# EAGLE board BMS (EAGLE 6.6.0)
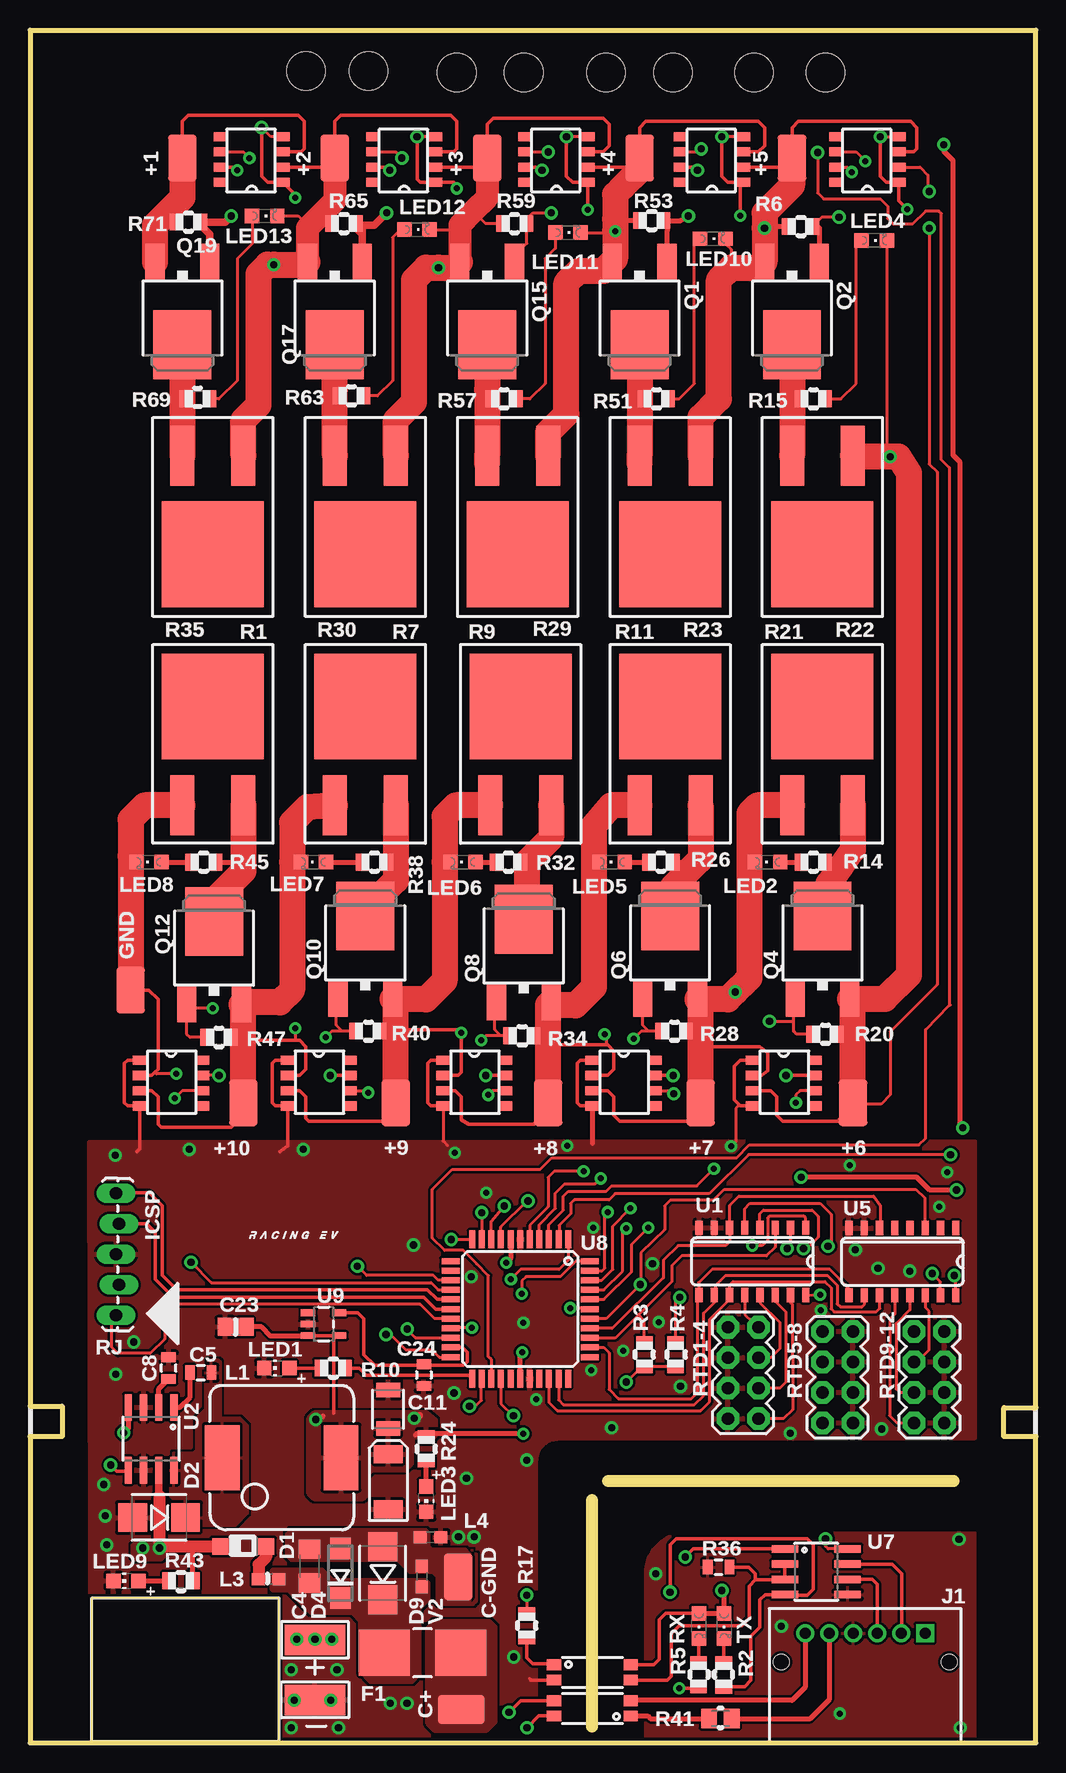
[diagram p0: board, top side]
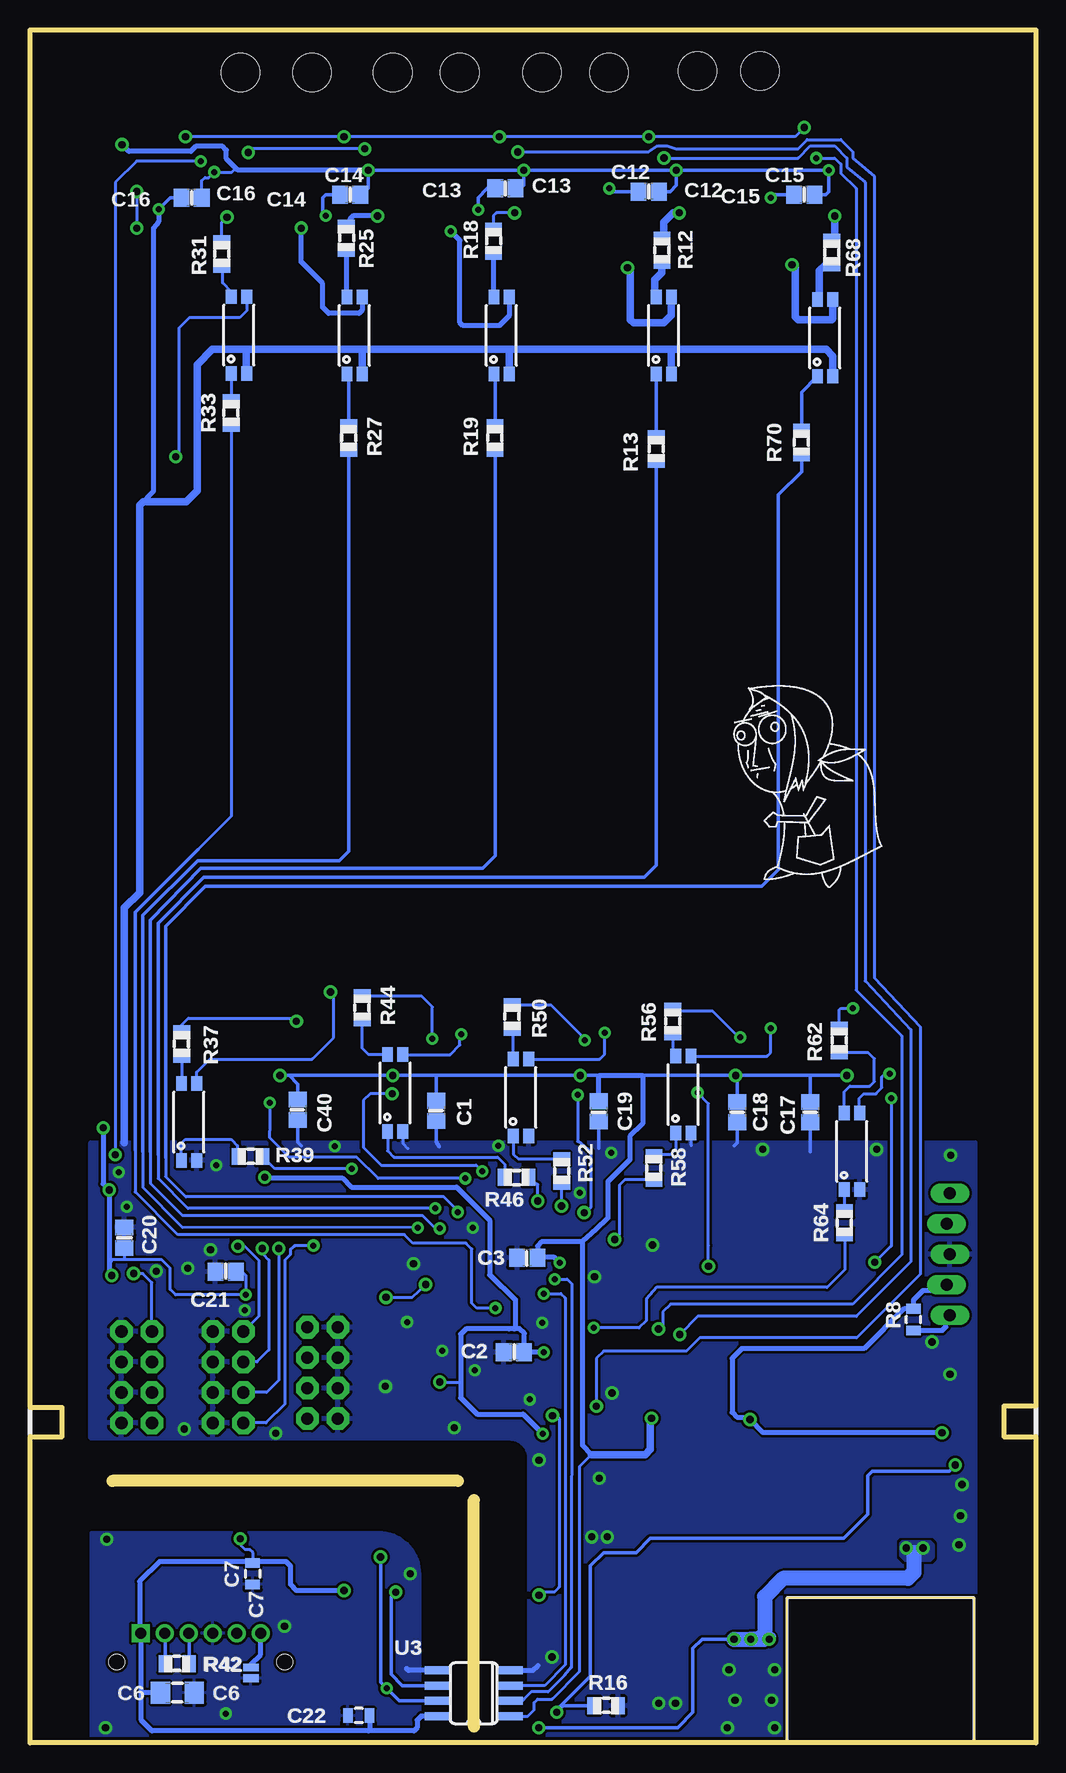
[diagram p1: board, bottom side, seen from below]

Size 83.82 x 142.75 mm. Coordinates in mm from the lower left corner, seen from the top.
Outline: 46.84,1.38 46.84,20.27
Outline: 48.15,21.84 76.96,21.84
Outline: 0,0 83.82,0 83.82,25.53 81.15,25.53 81.15,27.94 83.82,27.94 83.82,142.75 0,142.75 0,28.07 2.67,28.07 2.67,25.53 0,25.53 0,0
Copper layers (1*16): Top 0.035mm / dielectric 1.5mm / Bottom 0.035mm
Design rules "SparkFun *": minimum track width 8mil, minimum drill 18mil, track to track 8mil, track to pad 8mil, pad to pad 8mil, via to via 8mil, smd to smd 8mil, copper to edge 10mil, drill to drill 8mil, minimum pad ring 12mil, minimum via ring 10mil, stop-mask expansion 4mil, vias tented up to drill 25mil, thermal gap 10mil
Holes 3.2 mm at 22.99,139.32 28.19,139.32 35.56,139.19 41.15,139.19 48.01,139.19 53.59,139.19 60.32,139.19 66.29,139.19

## Footprints (pad centres in the part's own frame; a part is rotated, then mirrored left to right if it is on the bottom)
LUXEON-PAD = smd 3.9 x 2.4: P$1 0,0
C0805 = smd 1.3 x 1.5: 1 -0.85,0; 2 0.85,0
1206 = smd 1.6 x 1.8: 1 -1.4,0; 2 1.4,0
0805 = smd 0.8 x 1.2: 1 -0.9,0; 2 0.9,0
EIA6032 = smd 1.5 x 2.4: P$1 -2.3,0; P$2 2.3,0
UVR1J101MPD-CUTOUT = smd 5.08 x 2.54: + 0,2.5; - 0,-2.5
1210 = smd 1.2 x 2: 1 -1.6,0; 2 1.6,0
SOD123 = smd 1.4 x 1.4: A 1.9,0; C -1.9,0
SMB-DIODE = smd 2.4 x 2.4: A 2.2,0; C -2.2,0
DO-214AC = smd 1.8 x 1.7: A 2.05,0; C -2.05,0
0154XXDR = smd 4.24 x 3.81: 1 -3.19,0; 2 3.19,0
1X05_LOCK_LONGPADS = drill 1.016 long: 1 0,0; 2 2.54,-0.254; 3 5.08,0; 4 7.62,-0.254; 5 10.16,0
559350610 = drill 0.9 square: 1 -5,0 | drill 0.9: 2 -3,0; 3 -1,0; 4 1,0; 5 3,0; 6 5,0 | hole 1.3: 7,2.4; -7,2.4
INDUCTOR_5X3 = smd 2.9 x 5.4: 1 -4.95,0; 2 4.95,0
0603 = smd 1.1 x 1: 1 -0.85,0; 2 0.85,0
CHIP-LED0805 = smd 1.2 x 1.2: A 0,-1.05; C 0,1.05
CHIPLED_0805 = smd 1.2 x 1.2: A 0,-1.05; C 0,1.05
DPAK = smd 1.6 x 3: 1 -2.28,-4.04; 3 2.28,-4.04 | smd 4.826 x 5.715: 2 0,2.858
PFC10-5RF1 = smd 2 x 5: 1 -2.54,-8.22; 2 2.54,-8.22 | smd 8.5 x 8.8: TP 0,0
R0805 = smd 1.1 x 1.4: 1 -1,0; 2 1,0
M0805 = smd 1.3 x 1.6: 1 -0.95,0; 2 0.95,0
2X4 = drill 1.016 pad 1.88 octagon: 1 -3.81,-1.27; 2 -3.81,1.27; 3 -1.27,-1.27; 4 -1.27,1.27; 5 1.27,-1.27; 6 1.27,1.27; 7 3.81,-1.27; 8 3.81,1.27
PAD-JUMPER-2-NO_NO_SILK = smd 0.635 x 1.27: 1 -0.45,0; 2 0.45,0
SO-16 = smd 0.6 x 1.2: 1 -4.445,-2.8; 2 -3.175,-2.8; 3 -1.905,-2.8; 4 -0.635,-2.8; 5 0.635,-2.8; 6 1.905,-2.8; 7 3.175,-2.8; 8 4.445,-2.8; 9 4.445,2.8; 10 3.175,2.8; 11 1.905,2.8; 12 0.635,2.8; 13 -0.635,2.8; 14 -1.905,2.8; 15 -3.175,2.8; 16 -4.445,2.8
SO-8 = smd 0.61 x 2.21: 1 -1.905,-2.616; 2 -0.635,-2.616; 3 0.635,-2.616; 4 1.905,-2.616; 5 1.905,2.616; 6 0.635,2.616; 7 -0.635,2.616; 8 -1.905,2.616
SOIC-8 = smd 0.66 x 2.032: 1 -1.905,-3.073; 2 -0.635,-3.073; 3 0.635,-3.073; 4 1.905,-3.073; 5 1.905,3.073; 6 0.635,3.073; 7 -0.635,3.073; 8 -1.905,3.073
TQFP-44 = smd 1.5 x 0.5: 1 -5.8,4; 2 -5.8,3.2; 3 -5.8,2.4; 4 -5.8,1.6; 5 -5.8,0.8; 6 -5.8,0; 7 -5.8,-0.8; 8 -5.8,-1.6; 9 -5.8,-2.4; 10 -5.8,-3.2; 11 -5.8,-4; 23 5.8,-4; 24 5.8,-3.2; 25 5.8,-2.4; 26 5.8,-1.6; 27 5.8,-0.8; 28 5.8,0; 29 5.8,0.8; 30 5.8,1.6; 31 5.8,2.4; 32 5.8,3.2; 33 5.8,4 | smd 0.5 x 1.5: 12 -4,-5.8; 13 -3.2,-5.8; 14 -2.4,-5.8; 15 -1.6,-5.8; 16 -0.8,-5.8; 17 0,-5.8; 18 0.8,-5.8; 19 1.6,-5.8; 20 2.4,-5.8; 21 3.2,-5.8; 22 4,-5.8; 34 4,5.8; 35 3.2,5.8; 36 2.4,5.8; 37 1.6,5.8; 38 0.8,5.8; 39 0,5.8; 40 -0.8,5.8; 41 -1.6,5.8; 42 -2.4,5.8; 43 -3.2,5.8; 44 -4,5.8
SOT23-5 = smd 0.55 x 1.2: 1 -0.95,-1.3; 2 0,-1.3; 3 0.95,-1.3; 4 0.95,1.3; 5 -0.95,1.3
LT1990 = smd 0.762 x 1.143: 1 0,0; 2 1.27,0; 3 2.54,0; 4 3.81,0; 5 3.81,5.207; 6 2.54,5.207; 7 1.27,5.207; 8 0,5.207
SSOP-4 = smd 1.2 x 0.9: 1 -3.2,0.67; 2 -3.2,-0.6; 3 3.2,-0.6; 4 3.2,0.67

## Placement (x,y rotation side)
+1  M01SMD  [LUXEON-PAD]  12.7,132.08 90 top
+2  M01SMD  [LUXEON-PAD]  25.4,132.08 90 top
+3  M01SMD  [LUXEON-PAD]  38.1,132.08 90 top
+4  M01SMD  [LUXEON-PAD]  50.8,132.08 90 top
+5  M01SMD  [LUXEON-PAD]  63.5,132.08 90 top
+6  M01SMD  [LUXEON-PAD]  68.58,53.34 90 top
+7  M01SMD  [LUXEON-PAD]  55.88,53.34 90 top
+8  M01SMD  [LUXEON-PAD]  43.18,53.34 90 top
+9  M01SMD  [LUXEON-PAD]  30.48,53.34 90 top
+10  M01SMD  [LUXEON-PAD]  17.78,53.34 90 top
C1  .1uF  [C0805]  49.97,52.67 270 bottom
C2  .1uF  [C0805]  43.49,32.57 180 bottom
C3  .1uF  [C0805]  42.38,40.43 180 bottom
C4  1uF  [1206]  23.3,14.74 90 top
C5  0.1uF  [0805]  14.22,30.86 0 top
C6  10uF  [1206]  71.54,4.19 0 bottom
C7  .1uF  [0805]  65.27,14.11 270 bottom
C8  0.1uF  [0805]  11.56,31.24 90 top
C9  68uF  [EIA6032]  29.86,21.77 270 top
C10  100uF  [UVR1J101MPD-CUTOUT]  23.75,6.1 0 top
C11  1uF  [1210]  29.84,27.81 90 top
C12  .1uF  [C0805]  32.26,129.29 180 bottom
C13  .1uF  [C0805]  44.2,129.54 180 bottom
C14  .1uF  [C0805]  57.15,129.03 180 bottom
C15  .1uF  [C0805]  19.3,129.03 180 bottom
C16  .1uF  [C0805]  70.36,128.78 180 bottom
C17  .1uF  [C0805]  18.8,52.58 270 bottom
C18  .1uF  [C0805]  24.89,52.58 270 bottom
C19  .1uF  [C0805]  36.42,52.63 270 bottom
C20  .1uF  [C0805]  75.95,42.11 90 bottom
C21  .1uF  [C0805]  67.51,39.27 180 bottom
C22  .1uF  [0805]  56.42,2.29 180 bottom
C23  .1uF  [C0805]  17.13,34.67 180 top
C24  0.1uF  [0805]  32.82,30.66 270 top
C40  .1uF  [C0805]  61.51,52.76 270 bottom
C+  M01SMD  [LUXEON-PAD]  35.94,2.79 180 top
C-GND  M01SMD  [LUXEON-PAD]  35.69,13.84 270 top
D1  1N4001  [SOD123]  17.77,16.37 0 top
D2  VS-30BQ060TRPBF  [SMB-DIODE]  10.75,18.78 180 top
D4  TVS  [DO-214AC]  25.88,14.14 90 top
D9  45V  [SMB-DIODE]  29.4,14.14 90 top
F1  01541.25DR  [0154XXDR]  32.71,7.52 180 top
GND  M01SMD  [LUXEON-PAD]  8.38,62.74 270 top
ICSP  [1X05_LOCK_LONGPADS]  7.17,35.64 90 top
J1  55935-0610  [559350610]  69.6,9.14 180 top
L1  7447714101  [INDUCTOR_5X3]  20.97,23.78 0 top
L3  FERITEBEAD  [0603]  19.89,13.66 180 top
L4  FERITEBEAD  [0603]  33.37,17.16 0 top
LED1  [CHIP-LED0805]  20.57,31.24 90 top
LED2  [CHIPLED_0805]  61.47,73.41 90 top
LED3  [CHIP-LED0805]  33.02,20.32 180 top
LED4  [CHIPLED_0805]  70.36,125.22 270 top
LED5  [CHIPLED_0805]  48.51,73.41 90 top
LED6  [CHIPLED_0805]  36.07,73.41 90 top
LED7  [CHIPLED_0805]  23.62,73.41 90 top
LED8  [CHIPLED_0805]  9.91,73.41 90 top
LED9  [CHIP-LED0805]  8.01,13.51 90 top
LED10  [CHIPLED_0805]  56.9,125.35 270 top
LED11  [CHIPLED_0805]  44.83,125.86 270 top
LED12  [CHIPLED_0805]  32.26,126.11 270 top
LED13  [CHIPLED_0805]  19.56,127.25 270 top
Q1  MJD127T4  [DPAK]  50.8,119.38 180 top
Q2  MJD127T4  [DPAK]  63.5,119.38 180 top
Q4  MJD127T4  [DPAK]  66.04,66.04 0 top
Q6  MJD127T4  [DPAK]  53.34,66.04 0 top
Q8  MJD127T4  [DPAK]  41.15,65.79 0 top
Q10  MJD127T4  [DPAK]  27.94,66.04 0 top
Q12  MJD127T4  [DPAK]  15.34,65.6 0 top
Q15  MJD127T4  [DPAK]  38.1,119.38 180 top
Q17  MJD127T4  [DPAK]  25.4,119.38 180 top
Q19  MJD127T4  [DPAK]  12.7,119.38 180 top
R1  PFC10-5RF1  [PFC10-5RF1]  15.24,86.36 0 top
R2  1k  [R0805]  57.81,5.66 270 top
R3  10k  [R0805]  51.21,32.36 90 top
R4  10k  [R0805]  53.8,32.36 90 top
R5  1k  [R0805]  55.71,5.69 270 top
R6  10k  [R0805]  64.21,126.37 0 top
R7  PFC10-5RF1  [PFC10-5RF1]  27.94,86.36 0 top
R8  10k  [0805]  10.19,35.28 90 bottom
R9  PFC10-5RF1  [PFC10-5RF1]  40.89,86.36 0 top
R10  1k  [R0805]  25.27,31.24 0 top
R11  PFC10-5RF1  [PFC10-5RF1]  53.34,86.36 0 top
R12  330  [R0805]  31.16,124.39 270 bottom
R13  200  [R0805]  31.62,107.82 90 bottom
R14  399  [R0805]  65.28,73.41 0 top
R15  399  [R0805]  65.28,112.01 180 top
R16  100k  [R0805]  35.81,3.11 180 bottom
R17  1k  [R0805]  41.4,9.78 90 top
R18  330  [R0805]  45.2,125.15 270 bottom
R19  200  [R0805]  45.06,108.75 90 bottom
R20  10k  [R0805]  66.25,59.07 180 top
R21  PFC10-5RF1  [PFC10-5RF1]  66.04,86.36 0 top
R22  PFC10-5RF1  [PFC10-5RF1]  66.04,99.06 180 top
R23  PFC10-5RF1  [PFC10-5RF1]  53.34,99.06 180 top
R24  1k  [R0805]  33.02,24.51 90 top
R25  330  [R0805]  57.46,125.4 270 bottom
R26  399  [R0805]  52.58,73.41 0 top
R27  200  [R0805]  57.27,108.75 90 bottom
R28  10k  [R0805]  53.67,59.33 180 top
R29  PFC10-5RF1  [PFC10-5RF1]  40.64,99.06 180 top
R30  PFC10-5RF1  [PFC10-5RF1]  27.94,99.06 180 top
R31  330  [R0805]  67.85,124.08 270 bottom
R32  399  [R0805]  39.88,73.41 0 top
R33  200  [R0805]  67.06,110.83 90 bottom
R34  10k  [R0805]  40.97,58.94 180 top
R35  PFC10-5RF1  [PFC10-5RF1]  15.24,99.06 180 top
R36  10k  [0805]  57.38,14.65 0 top
R37  330  [R0805]  71.18,58.24 270 bottom
R38  399  [R0805]  28.7,73.41 0 top
R39  200  [R0805]  65.44,48.88 180 bottom
R40  10k  [R0805]  28.15,59.33 180 top
R41  [M0805]  57.53,2.03 0 top
R42  120  [R0805]  71.56,6.59 180 bottom
R43  3.3k  [R0805]  12.58,13.51 0 top
R44  330  [R0805]  56.14,61.27 270 bottom
R45  399  [R0805]  14.48,73.41 0 top
R46  200  [R0805]  43.27,47.14 180 bottom
R47  10k  [R0805]  15.75,58.8 180 top
R50  330  [R0805]  43.64,60.5 270 bottom
R51  399  [R0805]  52.2,112.01 180 top
R52  200  [R0805]  39.51,47.66 90 bottom
R53  10k  [R0805]  51.82,126.87 0 top
R56  330  [R0805]  30.25,60.12 270 bottom
R57  399  [R0805]  39.5,112.01 180 top
R58  200  [R0805]  31.83,47.92 90 bottom
R59  10k  [R0805]  40.39,126.62 0 top
R62  330  [R0805]  16.38,58.55 270 bottom
R63  399  [R0805]  26.8,112.27 180 top
R64  200  [R0805]  15.94,43.35 90 bottom
R65  10k  [R0805]  26.16,126.62 0 top
R68  330  [R0805]  17.02,124.21 270 bottom
R69  399  [R0805]  13.97,112.01 180 top
R70  200  [R0805]  19.53,108.37 90 bottom
R71  10k  [R0805]  13.21,126.75 0 top
RTD1-4  M04X2  [2X4]  59.44,30.84 90 top
RTD5-8  M04X2  [2X4]  67.31,30.48 90 top
RTD9-12  M04X2  [2X4]  74.93,30.48 270 top
RX  [CHIPLED_0805]  55.74,9.75 180 top
SJ1  JUMPER-PAD-2-NO  [PAD-JUMPER-2-NO_NO_SILK]  65.4,5.84 270 bottom
TX  [CHIPLED_0805]  57.84,9.75 180 top
U1  SN74LV4051ADR  [SO-16]  60.2,40.13 180 top
U2  MAX5035  [SO-8]  10.09,25.34 180 top
U3  ISO7221ADR  [SOIC-8]  46.84,4.15 90 bottom
U5  SN74LV4051ADR  [SO-16]  72.69,40.11 180 top
U7  SN75HVD08DR  [SO-8]  65.51,14.27 270 top
U8  PIC18F45K22  [TQFP-44]  40.84,36.16 270 top
U9  LM4128CMF-2.0/NOPB  [SOT23-5]  24.47,34.9 270 top
U$1  LT1990  [LT1990]  60.2,56.9 270 top
U$2  LT1990  [LT1990]  46.86,56.9 270 top
U$3  LT1990  [LT1990]  34.42,56.9 270 top
U$4  LT1990  [LT1990]  21.46,56.9 270 top
U$5  LT1990  [LT1990]  9.14,56.9 270 top
U$6  LT1990  [LT1990]  59.44,130.05 90 top
U$7  LT1990  [LT1990]  46.48,130.05 90 top
U$8  LT1990  [LT1990]  33.78,130.05 90 top
U$9  LT1990  [LT1990]  21.08,130.05 90 top
U$10  TCMT1103-OPTO  [SSOP-4]  17.53,117.09 90 bottom
U$11  TCMT1103-OPTO  [SSOP-4]  30.97,117.29 90 bottom
U$12  TCMT1103-OPTO  [SSOP-4]  44.49,117.29 90 bottom
U$13  TCMT1103-OPTO  [SSOP-4]  56.74,117.29 90 bottom
U$14  TCMT1103-OPTO  [SSOP-4]  66.37,117.32 90 bottom
U$15  TCMT1103-OPTO  [SSOP-4]  70.53,51.75 90 bottom
U$16  TCMT1103-OPTO  [SSOP-4]  53.35,54.17 90 bottom
U$17  TCMT1103-OPTO  [SSOP-4]  42.87,53.79 90 bottom
U$18  TCMT1103-OPTO  [SSOP-4]  29.34,54.03 90 bottom
U$19  TCMT1103-OPTO  [SSOP-4]  15.29,49.31 90 bottom
U$20  INDPK1  [PICKIT-PIN-1]  9.76,35.78 270 top
U$21  OLD_LADYM  [0L-M]  25.32,71.26 0 bottom
U$22  LOGO  [L-MS]  15.24,41.2 0 top
U$23  TCMT1103-OPTO  [SSOP-4]  46.86,2.92 180 top
U$24  TCMT1103-OPTO  [SSOP-4]  46.86,5.84 0 top
U$55  LT1990  [LT1990]  72.39,130.05 90 top
V2  45Vdc  [0603]  32.64,13.86 270 top

## Library data of the parts
+1-+10 C+ C-GND GND ICSP RTD1-4 RTD5-8 RTD9-12 = SparkFun-Connectors
C1-C3 C12-C21 C23 C40 LED1-LED13 R2-R6 R10 R12-R20 R24-R28 R31-R34 R37-R47 R50-R53 R56-R59 R62-R65 R68-R71 RX TX = adafruit
C4 C11 = SparkFun-Capacitors
C5-C9 C22 C24 R8 R36 SJ1 = SparkFun-Passives
C10 F1 J1 Q1 Q2 Q4 Q6 Q8 Q10 Q12 Q15 Q17 Q19 R1 R7 R9 R11 R21-R23 R29 R30 R35 U1 U2 U5 U7 U8 U$20 = FSAE Eletric
D1 = diode
D2 U$10-U$19 U$23 U$24 = SparkFun-DiscreteSemi
D4 L1 = NASA_LIB
D9 = SparkFun
L3 L4 V2 = EmEndev
U3 = Gasbarre
U9 = SparkFun-PowerIC
U$1-U$9 U$55 = Sam_Request
U$21 U$22 = Pic

## Nets
+5V: C1.1 C2.1 C3.1 C9.P$1 C11.1 C12.1 C13.1 C14.1 C15.1 C16.1 C17.1 C18.1 C19.1 C20.1 C21.1 C23.1 C40.1 ICSP.2 L1.2 R3.1 R4.1 R8.2 R24.2 U1.16 U2.4 U3.1 U5.16 U8.7 U8.28 U9.3 U9.4 U$1.7 U$2.7 U$3.7 U$4.7 U$5.7 U$6.7 U$7.7 U$8.7 U$9.7 U$55.7
A: U1.11 U5.11 U8.31
B: U1.10 U5.10 U8.32
B1: R70.1 U8.43
B2: R13.1 U8.42
B3: R19.1 U8.41
B4: R27.1 U8.40
B5: R33.1 U8.39
B6: R39.1 U8.3
B7: R46.1 U8.8
B8: R52.1 U8.9
B9: R58.1 U8.11
B10: R64.1 U8.19
C: U1.9 U5.9 U8.35
C1: U8.20 U$9.6
C2: U8.22 U$8.6
C3: U8.24 U$7.6
C4: U8.25 U$6.6
C5: U8.2 U$55.6
C6: U8.4 U$1.6
C7: U8.5 U$2.6
C8: U8.10 U$3.6
C9: U8.14 U$4.6
C10: U8.15 U$5.6
DIR: R36.2 U7.2 U7.3 U$24.3
GHT: D1.A L3.2
GND: C1.2 C2.2 C3.2 C8.2 C9.P$2 C10.- C11.2 C12.2 C13.2 C14.2 C15.2 C16.2 C17.2 C18.2 C19.2 C20.2 C21.2 C23.2 C24.2 C40.2 D2.A ICSP.3 L4.2 LED1.C LED3.C LED9.C R16.1 RTD1-4.2 RTD1-4.4 RTD1-4.6 RTD1-4.8 RTD5-8.1 RTD5-8.3 RTD5-8.5 RTD5-8.7 RTD9-12.2 RTD9-12.4 RTD9-12.6 RTD9-12.8 U1.7 U1.8 U2.3 U2.6 U3.4 U5.7 U5.8 U8.6 U8.29 U9.2 U$1.1 U$1.4 U$2.1 U$2.4 U$3.1 U$3.4 U$4.1 U$4.4 U$5.1 U$5.4 U$6.1 U$6.4 U$7.1 U$7.4 U$8.1 U$8.4 U$9.1 U$9.4 U$10.2 U$11.2 U$12.2 U$13.2 U$14.2 U$15.2 U$16.2 U$17.2 U$18.2 U$19.2 U$24.2 U$55.1 U$55.4
GNDIO: C6.2 C7.2 C22.2 J1.4 R36.1 SJ1.2 U3.5 U7.5
INH: U1.6 U5.6 U8.37
MODE: R17.2 U8.26
N$1: LED1.A R10.1
N$2: R10.2 U8.23
N$3: C10.+ D1.C R43.2 U2.7 U$23.4
N$4: RTD1-4.1 U1.15
N$5: RTD1-4.3 U1.14
N$6: C4.1 D4.C D9.C F1.2 L3.1 V2.2
N$7: RTD1-4.5 U1.13
N$8: R16.2 U2.5 U$23.3
N$9: +6.P$1 LED4.C Q4.3 R20.1 R22.1 U$1.3 U$14.3 U$55.2
N$10: RTD1-4.7 U1.12
N$11: RTD9-12.1 U5.15
N$12: R2.1 TX.C
N$13: R5.1 RX.C
N$14: RTD9-12.3 U5.14
N$15: LED9.A R43.1
N$16: +9.P$1 LED6.C Q10.3 R9.1 R40.1 U$3.2 U$4.3 U$17.3
N$17: Q2.1 R6.2 R31.1
N$18: +10.P$1 LED7.C Q12.3 R7.1 R47.1 U$4.2 U$5.3 U$18.3
N$19: RTD9-12.5 U5.13
N$20: R70.2 U$10.1
N$21: RTD9-12.7 U5.12
N$22: R13.2 U$11.1
N$23: Q4.1 R20.2 R37.1
N$24: LED4.A R15.1
N$25: LED3.A R24.1
N$26: C5.2 D2.C L1.1 U2.8
N$27: R68.2 U$10.4
N$28: LED2.A R14.1
N$29: R19.2 U$12.1
N$30: Q4.2 R14.2 R21.2
N$31: +8.P$1 LED5.C Q8.3 R11.1 R34.1 U$2.2 U$3.3 U$16.3
N$32: +7.P$1 LED2.C Q6.3 R21.1 R28.1 U$1.2 U$2.3 U$15.3
N$33: Q6.1 R28.2 R44.1
N$34: R44.2 U$16.4
N$35: LED5.A R26.1
N$36: R27.2 U$13.1
N$37: Q6.2 R11.2 R26.2
N$38: C5.1 U2.1
N$39: C24.1 U8.21 U9.5
N$40: ICSP.4 U8.17
N$41: Q8.1 R34.2 R50.1
N$42: R37.2 U$15.4
N$43: ICSP.5 U8.16
N$44: LED6.A R32.1
N$45: R33.2 U$14.1
N$46: ICSP.1 R8.1 U8.18
N$47: Q8.2 R9.2 R32.2
N$48: RTD5-8.2 U1.1
N$49: RTD5-8.4 U1.2
N$50: Q10.1 R40.2 R56.1
N$51: R62.2 U$19.4
N$52: LED7.A R38.1
N$53: R39.2 U$15.1
N$54: Q10.2 R7.2 R38.2
N$55: RTD5-8.6 U1.4
N$56: RTD5-8.8 U1.5
N$57: Q12.1 R47.2 R62.1
N$58: R12.2 U$11.4
N$59: LED8.A R45.1
N$60: R46.2 U$16.1
N$61: Q12.2 R1.2 R45.2
N$62: Q1.1 R25.1 R53.2
N$63: R18.2 U$12.4
N$64: Q2.2 R15.2 R22.2
N$65: R52.2 U$17.1
N$66: LED10.A R51.1
N$67: R25.2 U$13.4
N$68: Q1.2 R23.2 R51.2
N$69: +4.P$1 LED11.C Q1.3 R29.1 R53.1 U$6.3 U$7.2 U$12.3
N$70: +5.P$1 LED10.C Q2.3 R6.1 R23.1 U$6.2 U$13.3 U$55.3
N$71: C8.1 U2.2
N$72: Q15.1 R18.1 R59.2
N$73: R58.2 U$18.1
N$74: LED11.A R57.1
N$75: R31.2 U$14.4
N$76: Q15.2 R29.2 R57.2
N$77: R64.2 U$19.1
N$78: R50.2 U$17.4
N$79: +3.P$1 LED12.C Q15.3 R30.1 R59.1 U$7.3 U$8.2 U$11.3
N$80: Q17.1 R12.1 R65.2
N$81: R56.2 U$18.4
N$82: LED12.A R63.1
N$83: +1.P$1 Q19.3 R71.1 U$9.3
N$84: Q17.2 R30.2 R63.2
N$85: R17.1 U$24.1
N$87: +2.P$1 LED13.C Q17.3 R35.1 R65.1 U$8.3 U$9.2 U$10.3
N$88: Q19.1 R68.1 R71.2
N$89: GND.P$1 LED8.C R1.1 U$5.2 U$19.3
N$90: LED13.A R69.1
N$91: J1.5 R41.2
N$92: Q19.2 R35.2 R69.2
N$93: J1.6 SJ1.1 U$23.2
N$94: R41.1 U$23.1
RS-A: J1.3 R42.1 U7.6
RS-B: J1.2 R42.2 U7.7
RX: R5.2 U3.7 U7.1
RX1: U3.2 U8.1
T1: R3.2 U1.3 U8.36
T2: R4.2 U5.3 U8.38
TX: R2.2 U3.6 U7.4
TX1: U3.3 U8.44
V+: C6.1 C7.1 C22.1 J1.1 RX.A TX.A U3.8 U7.8 U$24.4
VCC: C+.P$1 F1.1
VSS: C4.2 C-GND.P$1 D4.A D9.A L4.1 V2.1

## Tracks (layer width: path | path; a pad name or v marks a point on that pad's centre or on a via)
+5V  (via drill 0.5, 0.6)
  Top 0.254: v15.75,55.63 U$5.7 | U$1.7 65.43,55.63 | U1.16 65.76,37.31 v65.84,37.34 | U5.16 77.14,38.79 v77.01,38.96 | U$55.7 68.07,131.32 v68.48,130.91 | R4.1 R3.1 50.97,31.36 v49.68,30.07 | R24.2 33.02,25.63 32.87,25.78
  Top 0.305: U$9.7 17.02,131.32 v17.27,131.06 | U$6.7 55.37,131.32 v55.63,131.06 | U$7.7 42.16,131.32 42.42,131.06 v42.67,131.06 | U$8.7 29.72,131.32 v29.97,131.06 | U$2.7 v53.59,55.63 51.82,55.63 | v62.99,55.63 U$1.7 | U$3.7 v37.97,55.63 | U$4.7 v25.02,55.63 | 23.14,33.91 U9.3 U9.4 25.41,33.95 25.32,33.86 25.32,27.46
  Top 0.406: U8.28 40.84,32.39 v41.02,32.56 | U8.7 40.04,40.37 v39.67,40 | v77.22,46.08 74.98,46.08 73.91,47.14 v64.26,47.14 | v76.15,133.2 76.15,132.64 76.91,131.88 76.91,107.34 77.47,106.78 77.47,51.51 v77.72,51.26 | v23.82,26.96 24.12,26.96 24.42,27.26 | U2.4 8.19,26.23 v7.82,25.86 | v41.1,25.78 32.87,25.78 32.22,25.78 32.12,25.67 | 23.14,33.91 20.06,33.91 19.3,34.67 C23.1
  Top 0.61: v32.02,27.06 32.22,27.06 32.42,27.26
  Bottom 0.254: 75.95,40.28 72.85,40.28 72.14,39.57 72.14,37.8 71.68,37.34 v65.84,37.34 65.84,38.96 66.14,39.27 C21.1 | 75.95,40.28 77.01,40.28 77.11,40.03 v77.01,38.96 | 66.67,131.24 67,130.91 v68.48,130.91 68.94,130.45 69.24,130.45 69.51,130.19 C16.1 | C20.1 75.95,40.28 | 42.64,32.77 42.64,32.76 C2.1 42.42,32.34 | U3.1 42.34,2.24 41.82,2.76 41.82,3.36 41.52,3.66 40.32,3.66 38.02,5.96 38.02,23.04 37.03,24.03 | v49.68,30.07 47.98,30.07 47.93,30.02 | 43.38,36.74 43.37,36.95
  Bottom 0.305: v29.97,131.06 v17.27,131.06 17.27,129.29 17.53,129.03 C15.1 | v29.97,131.06 v42.67,131.06 | v42.67,131.06 v55.63,131.06 55.63,129.54 56.13,129.03 C14.1 | 62.23,55.63 v53.59,55.63 50.04,55.63 | 50.04,55.63 v37.97,55.63 36.45,55.63 | v25.02,55.63 32.77,55.63 | 36.37,55.63 36.45,55.63 | v15.75,55.63 18.8,55.63 | 18.8,55.63 v25.02,55.63 | C12.1 30.48,129.29 29.97,129.79 v29.97,131.06 | C13.1 42.93,129.54 42.67,129.79 v42.67,131.06 | C40.1 61.49,54.88 62.23,55.63 | 62.23,55.63 v62.99,55.63 | C1.1 49.97,55.55 50.04,55.63 | C19.1 36.45,55.63 | C18.1 24.89,55.5 v25.02,55.63 | C17.1 18.8,55.63 | 40.04,40.37 v39.67,40
  Bottom 0.406: v41.02,32.56 C2.1 42.64,32.77 42.63,34.14 43.04,34.52 43.54,34.52 43.37,34.52 | v39.67,40 40.13,40.46 41.5,40.46 C3.1 | C3.1 | C19.1 36.42,55.58 36.37,55.63 32.77,55.63 32.77,51.61 33.83,50.55 33.83,48.62 35.66,46.79 35.66,43.74 36.68,42.77 37.39,42.16 37.79,41.76 | 37.79,41.76 37.79,24.79 37.03,24.03 | v77.01,38.96 77.22,39.22 v77.22,46.08 77.72,46.58 v77.72,51.26 | v64.26,47.14 64.11,47.09 57.81,47.09 57.05,46.33 48.26,46.33 45.51,43.58 45.51,39 43.37,36.95 43.37,34.52 | v55.63,131.06 66.5,131.06 66.67,131.24 67.46,132.03 67.46,132.74 67.77,133.04 70,133.04 70.41,132.64 75.59,132.64 v76.15,133.2 | ICSP.2 7.89,37.72 9.4,37.72 10.19,36.92 R8.2 11,36.19 14.32,32.86 24.52,32.86 25.32,32.06 25.32,27.56 24.92,27.16 24.02,27.16 v23.82,26.96 22.72,25.86 v7.82,25.86 | 37.79,41.76 37.79,41.78 | 41.55,40.45 C3.1 | 43.37,34.52 43.89,34.52 47.47,34.52 47.93,34.06 47.93,30.02 47.93,28.76 46.57,27.4 42.73,27.4 v41.1,25.78 | 37.79,41.76 41.2,41.76 41.53,41.43 C3.1 | C3.1
  Bottom 0.61: 37.03,24.03 32.55,24.03 32.12,24.46 32.12,26.96 v32.02,27.06
  pour Top: 23.24,20.83 23.24,27.05 23.75,27.56 33.02,27.56 33.78,26.92 33.78,25.65 33.27,25.15 32.13,25.15 31.75,24.64 31.75,23.24 31.24,22.73 28.45,22.73 28.07,22.35 28.07,20.7 27.69,20.32 23.75,20.32
A
  Top 0.254: U8.31 43.24,28.38 43.94,27.69 55.88,27.69 56.64,28.45 56.64,35.31 58.17,36.83 58.17,37.2 U1.11 58.29,38.18 58.57,38.46 66.24,38.46 66.75,37.95 66.75,36.17 67,35.92 70.51,35.92 70.81,36.22 70.81,37.28 U5.11
B
  Top 0.254: 43.94,30.23 44.04,30.33 U8.32 44.04,28.6 44.45,28.19 55.37,28.19 56.13,28.96 56.13,35.81 57.15,36.83 57.15,37.2 | 57.15,37.2 U1.10 | 69.54,37.33 U5.10 69.54,37.28 69.54,36.58 69.34,36.37 67.51,36.37 67.26,36.58 67.26,38.15 66.45,38.96 57.96,38.96 57.15,38.15 57.15,37.2
B1  (via drill 0.5)
  Top 0.254: 46.65,39.37 U8.43 47.69,39.36 47.9,39.57 47.9,43.99 v48.16,44.25
  Bottom 0.254: 72.52,48.77 72.52,47.19 70.84,45.52 49.33,45.52 48.16,44.35 v48.16,44.25
  Bottom 0.305: R70.1 19.53,105.95 21.46,104.01 21.46,72.77 22.86,71.37 69.21,71.37 72.52,68.07 72.52,48.77
B2  (via drill 0.5)
  Top 0.254: U8.42 47.65,38.56 48.56,39.47 48.56,43.08 v50.04,44.55
  Bottom 0.254: 73.15,49.02 73.15,47.04 70.66,44.55 v50.04,44.55
  Bottom 0.305: R13.1 31.62,73.15 32.64,72.14 69.34,72.14 73.15,68.33 73.15,49.02
B3  (via drill 0.5)
  Top 0.254: U8.41 47.82,37.76 49.38,39.32 49.38,42.57 v49.68,42.88
  Bottom 0.254: 73.79,49.28 73.79,46.63 71.09,43.94 51.1,43.94 50.04,42.88 v49.68,42.88
  Bottom 0.305: R19.1 45.06,73.93 46.1,72.9 69.6,72.9 73.79,68.58 73.79,49.28
B4  (via drill 0.5)
  Top 0.254: U8.40 47.83,36.96 50.14,39.27 50.14,41.55 v51.51,42.93
  Bottom 0.254: 74.42,49.28 74.42,46.33 71.12,42.98 v51.51,42.93
  Bottom 0.305: R27.1 57.27,74.3 58.04,73.53 69.85,73.53 74.42,68.96 74.42,49.28
B5  (via drill 0.5)
  Top 0.254: U8.39 46.73,36.25 v45.03,36.25
  Bottom 0.254: 75.06,49.4 75.06,45.92 71.5,42.37 52.63,42.37 51.92,41.66 47.5,41.66 46.99,41.15 46.99,36.63 46.58,36.23 v45.03,36.25 | R33.1 67.06,77.21 69.85,74.42
  Bottom 0.305: 69.85,74.42 75.06,69.22 75.06,49.4
B6  (via drill 0.5)
  Top 0.254: U8.3 43.24,43.19 44.45,44.4 44.45,45.57 44.86,45.97 48.01,45.97 48.46,46.43 55.57,46.43 v57,47.85
  Bottom 0.254: v57,47.85 63.42,47.85 R39.1
B7  (via drill 0.6)
  Top 0.254: U8.8 39.24,43 41.4,45.16 v41.5,45.16
  Bottom 0.254: v41.5,45.16 41.5,46.52 R46.1
B8  (via drill 0.6)
  Top 0.254: U8.9 38.44,43.47 v39.52,44.75
  Bottom 0.254: v39.52,44.75 39.52,45.51 R52.1
B9  (via drill 0.6)
  Top 0.254: v35.1,41.96 U8.11
  Bottom 0.254: R58.1 34.26,46.92 34.7,46.48 34.7,42.37 v35.1,41.96
B10  (via drill 0.5)
  Top 0.254: v36.83,34.59 35.08,34.59 U8.19
  Bottom 0.254: R64.1 15.94,39.43 17.4,37.97 31.6,37.97 32.46,36.96 32.46,35.2 33.07,34.59 v36.83,34.59
C
  Top 0.254: U8.35 47.81,32.96 48.26,32.51 48.26,29.46 49.02,28.7 55.12,28.7 55.63,29.21 55.63,37.2 U1.9 55.73,37.36 55.73,38.35 56.84,39.47 66.65,39.47 68.25,37.87 U5.9
C1  (via drill 0.5, 0.6)
  Top 0.254: U$9.6 17.78,132.59 v18.29,132.08 | v31.44,34.49 32.11,33.78 35.02,33.78 U8.20
  Bottom 0.254: v18.29,132.08 16.76,132.08 16.26,131.57 16.26,130.81 14.99,129.54 14.99,62.74 11.18,58.93 11.18,40.66 15.26,36.58 30.43,36.58 31.09,35.92 31.09,34.8 v31.44,34.49
C2  (via drill 0.6)
  Top 0.254: U$8.6 30.48,132.59 v30.99,132.08 | 35.01,32.13 U8.22 34.12,32.16 33.52,32.76 31.32,32.76 30.04,34.04 v29.67,34.04
  Bottom 0.254: v30.99,132.08 19.81,132.08 18.8,133.1 16.76,133.1 15.75,132.08 15.75,131.32 14.22,130.05 14.22,63.5 10.41,59.44 10.41,40.11 14.96,35.56 28.19,35.56 v29.67,34.04
C3  (via drill 0.6)
  Top 0.254: U$7.6 v43.18,132.59 | v36.62,28.06 37.12,28.06 37.62,28.56 37.62,30.34 U8.24
  Bottom 0.254: v43.18,132.59 32.26,132.59 31.5,133.1 30.73,133.1 29.97,132.84 19.81,132.84 19.05,133.6 16.26,133.6 15.24,132.59 15.24,132.08 13.46,130.56 13.46,63.75 9.65,59.69 9.65,39.04 14.93,33.76 28.02,33.76 29.12,32.66 36.02,32.66 36.62,32.06 v36.62,28.06
C4  (via drill 0.6)
  Top 0.254: U$6.6 55.57,132.59 55.83,132.84 v55.93,132.84 | v65.63,132.54 65.63,129.18 66.14,128.68 70.87,128.68 71.48,128.07 71.48,127.05 71.93,126.59 73.56,126.59 74.62,127.66 75.74,127.66 75.95,127.46 75.95,106.93 76.61,106.27 76.61,61.47 | 76.61,61.47 74.62,59.44 74.62,50.39 74.07,49.83 59.94,49.83 58.88,48.77 43.49,48.77 42.52,47.8 35.2,47.8 33.53,46.13 33.53,42.06 34.54,41.05 36.12,41.05 36.73,40.44 37.23,39.92 38.19,38.96 38.2,32.18 38.42,31.96 38.42,30.39 U8.25 | 76.61,61.47 76.71,61.52
  Bottom 0.254: v55.93,132.84 65.33,132.84 v65.63,132.54
C5  (via drill 0.5, 0.6)
  Top 0.254: U$55.6 68.83,132.59 v69.6,131.83 | v76.71,49.02 59.89,49.02 56.59,45.77 48.77,45.77 48.26,45.26 45.36,45.26 45.06,44.96 45.06,44.09 44.09,43.13 44.09,42.01 U8.2
  Bottom 0.254: v69.6,131.83 74.93,131.83 76.71,130.05 v76.71,49.02 76.68,49.61
C6  (via drill 0.5)
  Top 0.254: 65.02,54.36 64.19,54.36 63.83,54 v63.83,53.34 | U8.4 42.44,43.21 43.79,44.55 43.79,45.82 44.55,46.58 47.09,46.58 v47.55,47.04
  Top 0.305: U$1.6 65.02,54.36
  Bottom 0.254: v63.83,53.34 63.83,51.03 63.86,51 63.86,50.44 62.23,48.82 56.59,48.82 54.81,47.04 v47.55,47.04
C7  (via drill 0.5, 0.6)
  Top 0.254: U$2.6 53.39,54.36 v53.64,54.1 | v46.13,47.65 43.69,47.65 43.18,47.14 43.18,44.7 41.66,43.13 41.66,41.97 U8.5
  Bottom 0.254: v53.64,54.1 55.47,54.1 56.03,53.54 56.03,49.63 54.56,48.16 46.63,48.16 v46.13,47.65
C8  (via drill 0.5, 0.6)
  Top 0.254: U$3.6 38.53,54.36 v38.18,54 | v37.64,44.2 U8.10
  Bottom 0.254: v38.18,54 38.18,50.14 38.15,50.14 37.08,49.28 37.08,44.65 v37.64,44.2
C9  (via drill 0.5, 0.6)
  Top 0.254: U$4.6 28.04,54.36 v28.19,54.2 | U8.14 34.02,38.56 33.62,38.96 28.04,38.96 v27.28,39.73
  Bottom 0.254: 28.19,54.18 v28.19,54.2 27.28,53.29 27.28,41.46 v27.28,39.73
C10  (via drill 0.5, 0.6)
  Top 0.254: U$5.6 12.7,54.36 v12.06,53.72 | U8.15 | 35.01,37.8 U8.15 | v13.42,40.06 15.12,38.36 33.42,38.36 34.02,37.76 U8.15
  Bottom 0.254: v12.06,53.72 12.06,41.38 12.1,41.38 v13.42,40.06
DIR
  Top 0.305: U7.2 U7.3 62.85,13.59 60.45,13.59 | U$24.3 53.11,5.24 53.42,5.55 53.42,9.1 54.1,9.78 59.31,9.78 59.94,10.41 59.94,13.08 60.45,13.59 | R36.2 59.9,14.65 60.45,14.1 60.45,13.59
GHT
  Top 1.016: D1.A 19.67,15.48 19.05,14.86 L3.2
GND  (via drill 0.5, 0.6)
  Top 0.254: U$9.4 20.07,133.86 v19.3,134.62 | v70.87,133.86 U$55.4 | U$8.4 v32.26,133.86 | U$7.4 v44.7,133.86 | U$6.4 v57.66,133.86 | U$3.4 34.42,50.16 34.8,49.78 | U$1.4 59.03,53.09 58.83,52.88 58.83,50.14 v58.42,49.73
  Top 0.305: v19.3,134.62 19.3,130.56 19.81,130.05 U$9.1 22.1,129.03 v22.1,128.78 | v32.26,133.86 32.26,130.3 32.51,130.05 U$8.1 35.31,130.05 35.56,129.79 v35.56,129.54 | v44.7,133.86 44.7,130.56 45.21,130.05 U$7.1 v46.48,127.76 | v57.66,133.86 57.66,130.56 58.17,130.05 U$6.1 59.18,129.79 v59.18,127.25 | U$1.1 59.18,56.9 58.67,56.39 58.67,53.59 59.18,53.09 U$1.4 | U$2.1 45.85,56.9 45.59,56.64 45.59,53.34 45.85,53.09 U$2.4 | U$4.1 20.45,56.9 20.19,56.64 20.19,53.34 20.45,53.09 U$4.4 21.46,49.78 20.83,49.28 | U$3.4 33.4,53.09 33.15,53.34 33.15,56.64 33.4,56.9 U$3.1 | U$5.1 8.13,56.9 7.87,56.64 7.87,53.34 8.13,53.09 U$5.4 9.14,49.53 8.89,49.28 | v70.87,133.86 70.87,130.56 71.37,130.05 U$55.1 72.39,128.52 v73.1,127.81 | U$24.2 41.75,5.24 41.66,5.33
  Top 0.406: U$2.4 46.86,49.96
  Bottom 0.254: v19.3,134.62 20.07,133.86 v32.26,133.86 v44.7,133.86 v57.66,133.86 v70.87,133.86 | U$16.2 52.75,49.96 52.32,49.53 | U$18.2 28.74,49.82 28.7,49.78
  Bottom 0.305: C15.2 21.84,129.03 v22.1,128.78 | C12.2 35.31,129.29 v35.56,129.54 | C13.2 45.72,129.54 46.48,128.78 v46.48,127.76 | C14.2 59.18,129.03 59.44,128.78 59.44,127.51 v59.18,127.25 | C16.2 72.14,128.78 v73.1,127.81 | C40.2 61.51,50.08 61.21,49.78 | C1.2 49.97,50.12 49.73,49.68 | C19.2 36.42,49.58 | C18.2 24.89,50.04 25.15,49.78 | C17.2 18.8,49.28
  Bottom 0.406: v73.1,127.81 73.1,126.77 73.53,126.24 73.53,104.32 74.68,103.12 | U3.4 41.9,6.05 41.5,6.45
  Bottom 0.61: 75.95,50.04 75.95,69.6 74.68,70.87 74.68,103.12 74.37,103.43 70.81,103.43 69.9,104.34 69.9,114.86 68.63,116.13 65.79,116.13 | U$10.2 16.93,115.58 17.47,116.13 30.33,116.13 | 30.33,116.13 43.99,116.13 | 43.99,116.13 56.18,116.13 | 56.18,116.13 65.79,116.13 | 65.79,116.13 65.79,114.13 U$14.2 | U$13.2 56.14,116.08 56.18,116.13 | U$12.2 43.89,116.02 43.99,116.13 | U$11.2 30.37,116.09 30.33,116.13
  other vias: 75.77,44.68 35.38,49.2 44.78,49.76 68.3,48.16 8.65,33.41 54.2,29.72 36.38,22.06 36.77,38.85 31.95,41.5 41.4,23.57 13.27,49.47 51.87,39.93 68.78,41.1 7.15,30.72 63.35,25.81 70.97,26.16 35.33,29.17 65.91,36.07 6.15,21.54 6.27,18.92 6.4,16.51 76.43,47.55 73.3,39.32 41.12,35.03 38.02,45.85 42.19,28.63 49.45,32.69 52.4,35.08 35.71,17.17 7.1,48.97 22.77,49.47 70.67,39.57 48.47,26.27 21.77,1.27 25.7,1.27 21.77,6.1 25.58,6.1 22.02,3.56 25.07,3.56 31.42,3.3 30.02,3.3 40.32,7.17 37.01,17.17 46.93,42.94 46.77,31.06
  pour Bottom (rank 5): 5.08,0 42.16,0 42.16,23.7 arc-90 43.87,25.4 78.74,25.4 78.74,50.04 5.08,50.04
  pour Top (rank 4): 5.08,0 42.16,0 42.16,23.6 arc-90 43.96,25.4 78.74,25.45 78.74,50.09 4.95,50.04
GNDIO  (via drill 0.5, 0.6)
  Bottom 0.406: U3.5 52.28,6.05 52.45,6.22
  other vias: 77.52,1.27 62.62,9.73 77.42,16.97 52.14,14.1 67.5,2.45
  pour Bottom: 78.74,0.25 51.31,0 51.31,14.07 arc-90 54.76,17.53 78.74,17.53
  pour Top: 78.74,0.25 51.31,0 51.31,14.12 arc-90 54.72,17.53 78.74,17.53
INH
  Top 0.254: U8.37 46.66,34.54 48.51,34.54 52.78,38.76 52.78,40.23 54,41.45 57.96,41.45 58.29,41.78 U1.6 58.32,42.96 58.32,44.81 59.08,45.57 70.31,45.57 70.87,44.81 70.87,42.98 U5.6
MODE  (via drill 0.6)
  Top 0.254: U8.26 39.24,28.27 v40.28,27.28 | v41.4,12.32 R17.2
  Bottom 0.254: v40.28,27.28 40.03,27.28 39.73,27.03 39.73,12.98 40.13,12.57 41.15,12.57 v41.4,12.32
N$1
  Top 0.305: LED1.A R10.1
N$2
  Top 0.305: R10.2 27.44,31.24 28.02,30.66 36.55,30.66 U8.23
N$3  (via drill 0.6)
  Top 0.305: U$23.4 42.4,2.25 v41.42,1.27
  Top 0.406: C10.+ 22.26,8.6 v22.22,8.64 | R43.2 13.58,16.26 13.46,16.37
  Top 0.61: 10.79,20.57 10.73,20.57 U2.7 | v10.79,16.26 10.79,16.37
  Top 1.016: D1.C 13.46,16.37 10.79,16.37 10.79,20.57
  Bottom 0.254: v10.79,16.26 10.29,16 10.16,15.88
  Bottom 0.305: v41.42,1.27 29.84,1.27 28.57,2.54 28.57,7.87 27.81,8.64 v25.15,8.64
  Bottom 0.406: 23.11,8.64 v23.75,8.64
  Bottom 0.61: v25.15,8.64 23.11,8.64 v22.22,8.64 21.97,8.89
  Bottom 1.27: 10.16,15.88 10.16,14.22 10.67,13.72 21.08,13.72 22.61,12.19 22.61,9.14 23.11,8.64 | v25.15,8.64 22.64,8.64 22.62,8.66 23.72,8.66
  other vias: 9.4,16.26
  pour Top: 8.76,16.76 10.92,16.76 11.3,16.38 11.3,15.62 10.92,15.24 8.76,15.24 8.51,15.49 8.51,16.51
  pour Bottom: 8.51,16.51 8.76,16.76 11.18,16.76 11.3,16.64 11.3,15.62 10.92,15.24 8.76,15.24 8.51,15.49
N$4
  Top 0.254: U1.15 63.37,36.7 63.5,36.58 63.55,27.79 62.79,27.03 RTD1-4.1
N$5
  Top 0.254: U1.14 62.1,36.8 62.99,35.92 62.99,30.07 62.48,29.57 RTD1-4.3
N$6
  pour Top (no thermals): 20.19,12.7 21.46,12.7 23.37,10.8 26.8,10.8 27.43,10.16 27.43,5.97 28.32,5.08 31.88,5.08 32.51,5.71 32.51,11.18 33.27,11.94 33.27,13.33 33.02,13.59 25.27,13.59 24.38,14.48 20.19,14.48 20.07,14.35 20.07,12.83
N$7
  Top 0.254: U1.13 60.83,36.7 62.48,35.05 62.48,32.87 61.72,32.11 RTD1-4.5
N$8  (via drill 0.6)
  Top 0.305: U$23.3 40.88,3.52 v39.92,2.56 | v6.72,23.16 7.22,22.66 8.12,22.66 U2.5
  Bottom 0.305: v6.72,23.16 7.22,22.66 13.62,22.66 14.02,22.26 14.02,19.06 16.02,17.06 32.12,17.06 33.32,15.86 36.02,15.86 37.12,14.76 37.12,5.56 39.92,2.76 v39.92,2.56 39.37,3.11 R16.2
N$9  (via drill 0.6)
  Top 0.254: LED4.C 71.41,107.22 71.37,107.19 | R20.1 68.47,59.07 68.58,59.18 | U$55.2 74.17,131.32 74.83,130.66 74.83,129.39 v74.93,129.29 | v71.68,107.19 72.22,107.19 72.67,106.74 | v74.93,126.24 74.93,106.58 75.59,105.92 75.59,63.19 71.68,59.28 71.68,54 70.92,53.24 68.68,53.24 +6.P$1
  Top 0.305: U$1.3 61.72,54.36 62.23,53.85 62.23,52.32 62.74,51.82 67.31,51.82 +6.P$1
  Top 2.184: R22.1 68.67,107.19 71.37,107.19 v71.68,107.19 72.39,107.19 72.67,106.74 73.25,105.82 73.25,64.01 71.25,62 Q4.3 68.58,61.74 68.58,59.18 +6.P$1
  Bottom 0.254: v74.93,129.29 v74.93,126.24 | U$14.3 65.77,119.35 66.34,118.77 70.54,118.77 71.41,117.91 71.41,107.46 v71.68,107.19
N$10
  Top 0.254: U1.12 59.56,35.69 RTD1-4.7
N$11  (via drill 0.6)
  Top 0.254: U5.15 75.87,38.43 v75.18,39.12
  Bottom 0.254: RTD9-12.1 73.66,38.35 74.42,39.12 v75.18,39.12
N$12
  Top 0.305: R2.1 57.81,8.67 TX.C
N$13
  Top 0.305: RX.C 55.71,8.68 R5.1
N$14
  Top 0.254: RTD9-12.3 73.91,31.75 74.93,32.77 74.93,35.97 74.62,36.27 74.62,37.28 U5.14
N$15
  Top 0.406: LED9.A R43.1
N$16  (via drill 0.5)
  Top 0.254: R40.1 30.46,59.33 30.48,59.31 | v35.94,59.18 35.81,59.18 35.56,59.44
  Top 0.305: U$4.3 22.48,54.36 22.99,53.85 22.99,52.07 23.24,51.82 29.34,51.82 +9.P$1 | U$3.2 35.69,55.63 35.94,55.88 v35.94,59.18 35.69,59.44 35.56,59.44 30.73,59.44 30.48,59.18
  Top 0.406: LED6.C 34.54,73.41
  Top 2.184: 38.1,78.49 38.35,78.23 R9.1 35.47,78.14 34.54,77.22 34.54,73.41 34.54,63.5 33.02,61.98 30.24,61.98 Q10.3 30.48,61.74 30.48,59.31 30.48,59.18 +9.P$1
  Bottom 0.254: U$17.3 36.35,56.99 35.94,57.4 v35.94,59.18
N$17  (via drill 0.6)
  Top 0.254: v67.41,127.15 66,127.15 R6.2
  Top 0.406: R6.2 65.65,126.37 65.79,126.24 65.79,124.21 66.04,124.21 66.04,123.68 Q2.1
  Bottom 0.254: R31.1 67.85,126.72 v67.41,127.15
N$18  (via drill 0.5)
  Top 0.254: R47.1 17.65,58.8 17.78,58.67 | v22.1,59.56 22.1,58.67 22.22,58.55
  Top 0.305: U$4.2 22.48,55.63 22.99,56.13 22.99,58.04 22.48,58.55 22.22,58.55 17.78,58.55 | U$5.3 10.16,54.36 10.67,53.85 10.67,51.56 10.92,51.31 16.76,51.31 17.53,52.07 18.03,53.09 +10.P$1
  Top 0.61: LED7.C 21.84,73.41
  Top 2.184: R7.1 23.11,77.98 21.84,76.71 21.84,73.41 21.84,62.74 20.83,61.72 17.79,61.72 Q12.3 17.78,61.4 17.78,58.67 17.78,58.55 +10.P$1
  Bottom 0.254: U$18.3 22.4,57.23 22.1,57.53 v22.1,59.56
N$19
  Top 0.254: U5.13 73.33,36.09 72.19,34.95 72.19,29.52 72.49,29.21 RTD9-12.5
N$20
  Bottom 0.305: R70.2 19.53,112.56 U$10.1
N$21
  Top 0.254: U5.12 72.06,35.74 71.63,35.31 71.63,27.28 72.24,26.67 RTD9-12.7
N$22
  Bottom 0.305: R13.2 31.62,114.07 U$11.1
N$23  (via drill 0.6)
  Top 0.254: R20.2 63.87,59.07 63.63,59.31 63.63,60.05 | 63.63,60.05 63.63,61.87 Q4.1 | v61.62,60.15 63.52,60.15 63.63,60.05
  Bottom 0.254: R37.1 71.18,59.83 70.61,60.4 61.87,60.4 v61.62,60.15
N$24
  Top 0.254: R15.1 67.56,112.01 68.83,113.28 68.83,124.75 LED4.A
N$25
  Top 0.406: LED3.A R24.1
N$26
  pour Top: 11.68,22.1 11.68,20.57 11.94,20.32 11.94,18.92 12.7,18.16 17.14,18.16 18.16,19.18 18.16,26.42 17.53,27.05 16,27.05 15.88,27.18 15.88,31.75 15.75,31.88 14.86,31.88 14.6,31.62 14.6,27.81 13.84,27.05 13.84,24.38 13.59,24.13 11.94,24.13 11.68,23.88
N$27
  Bottom 0.61: R68.2 17.51,123.21 18.03,122.68 18.03,120.46 U$10.4
N$28
  Top 0.406: LED2.A R14.1
N$29
  Bottom 0.305: R19.2 45.06,114 U$12.1
N$30
  Top 0.406: R14.2 67.4,73.41 67.66,73.15
  Top 2.184: R21.2 68.58,74.42 67.66,73.15 66.55,71.63 66.55,68.58 66.04,68.07 Q4.2
N$31  (via drill 0.5)
  Top 0.254: R34.1 42.94,58.94 43.18,59.18 | v47.88,59.05 48.01,58.93 48.01,58.29 48.13,58.17
  Top 0.305: U$2.2 48.13,55.63 48.64,56.13 48.64,57.66 48.13,58.17 43.18,58.17 | U$3.3 35.43,54.36 35.94,53.85 35.94,51.94 36.58,51.56 42.04,51.56 +8.P$1
  Top 0.406: 43.18,59.61 43.18,59.44 | LED5.C 46.99,73.41
  Top 2.184: R11.1 48.42,78.14 46.99,76.45 46.99,73.41 46.99,62.99 45.47,61.47 43.2,61.47 Q8.3 43.18,61.49 43.18,59.44 43.18,59.18 43.18,58.17 +8.P$1
  Bottom 0.254: U$16.3 48.8,57.37 48.01,58.17 48.01,58.93 v47.88,59.05
N$32  (via drill 0.6)
  Top 0.254: R28.1 55.61,59.33 55.88,59.05
  Top 0.305: U$1.2 60.96,55.63 61.47,56.01 61.47,57.53 60.83,58.04 56.51,58.04 55.5,57.66 56.39,54.86 55.88,54.36 | U$2.3 48.13,54.36 48.64,53.85 48.64,52.32 49.15,51.82 54.74,51.82 +7.P$1
  Top 0.406: LED2.C 59.94,73.41
  Top 2.184: R21.1 60.61,78.14 59.94,77.47 59.94,73.41 59.94,63.75 59.64,63.45 v58.78,62.59 58.17,61.98 55.64,61.98 Q6.3 55.88,61.74 55.88,59.05 55.88,54.36 +7.P$1
  Bottom 0.254: U$15.3 69.93,55.9 68.83,57 60.3,57 58.52,58.78 58.52,62.33 v58.78,62.59
N$33  (via drill 0.5)
  Top 0.254: Q6.1 51.05,59.82 51.55,59.33 R28.2 50.94,59.33 v50.29,58.67
  Bottom 0.254: v50.29,58.67 50.29,61.34 51.18,62.23 56.11,62.23 R44.1
N$34
  Bottom 0.254: U$16.4 55.59,57.37 56.13,57.91 56.13,60.26 R44.2
N$35
  Top 0.406: LED5.A R26.1
N$36
  Bottom 0.305: R27.2 57.27,113.95 U$13.1
N$37
  Top 0.406: R26.2 55.12,73.41 55.37,73.15
  Top 2.184: R11.2 55.88,73.66 55.37,73.15 53.59,71.37 53.59,69.15 Q6.2
N$38
  Top 0.406: U2.1 12.47,27.96 13.33,28.83 13.33,30.85 C5.1
N$39
  Top 0.254: C24.1 32.72,31.46
  Top 0.305: U8.21 36.02,32.96 36.42,32.56 36.42,31.76 36.12,31.46 32.72,31.46 28.72,31.46 27.82,32.36 27.82,35.36 27.32,35.86 25.78,35.86 U9.5
N$40
  Top 0.305: U8.17 33.82,36.16 32.82,37.16 11.92,37.16 10.42,38.66 10.42,42.56 9.72,43.26 ICSP.4 | ICSP.4
N$41  (via drill 0.5)
  Top 0.254: Q8.1 38.74,61.61 38.74,59.44 39.23,58.94 R34.2 37.99,58.94 v37.59,58.55
  Bottom 0.254: v37.59,58.55 37.59,58.67 40.42,61.5 R50.1
N$42
  Bottom 0.254: R37.2 71.18,54.97 U$15.4
N$43
  Top 0.305: U8.16 33.92,36.96 33.12,37.76 12.22,37.76 11.02,38.96 11.02,44.76 9.92,45.86 7.23,45.86 ICSP.5
N$44
  Top 0.406: LED6.A R32.1
N$45
  Bottom 0.254: U$14.1 67.04,111.86 R33.2
N$46
  Top 0.254: U8.18 33.72,35.36 32.52,36.56 11.62,36.56 11.22,36.16 11.22,33.66 10.02,32.46 7.32,32.46 6.82,32.96 6.82,35.29 ICSP.1 7.75,35.06
  Bottom 0.406: R8.1 7.78,34.38 7.49,34.67 7.49,35.32 ICSP.1
N$47
  Top 0.406: R32.2 41.4,73.41
  Top 2.184: R9.2 43.43,75.44 41.4,73.41 41.4,69.6 41.15,69.34 41.08,69.34 Q8.2
N$48  (via drill 0.5)
  Top 0.254: U1.1 64.64,43.71 64.52,43.89 61.62,43.89 61.47,43.74 61.47,41.91 61.01,41.45 v60.2,41.45
  Bottom 0.254: v60.2,41.45 61.77,41.45 62.13,41.15 62.13,40.69 62.59,40.23 62.59,28.24 64.16,26.67 RTD5-8.2
N$49  (via drill 0.6)
  Top 0.254: U1.2 63.37,41.48 v63.09,41.2
  Bottom 0.254: 65.99,29.26 RTD5-8.4 64.11,29.21 63.09,30.23 v63.09,41.2
N$50  (via drill 0.5)
  Top 0.254: Q10.1 25.53,61.87 25.53,59.82 26.02,59.33 R40.2 25.16,59.33 v24.64,58.8
  Bottom 0.254: v24.64,58.8 24.76,58.8 26.92,60.96 30.08,60.96 R56.1
N$51
  Bottom 0.254: U$19.4 15.98,54.25 15.49,54.74 13.84,54.74 13.46,55.12 13.46,57.02 13.97,57.53 16.37,57.53 R62.2
N$52
  Top 0.406: LED7.A R38.1
N$53
  Bottom 0.254: U$15.1 71.2,49.96 70.87,50.29 67.06,50.29 66.55,49.78 66.55,48.98 R39.2
N$54
  Top 0.406: R38.2 30.48,73.41
  Top 2.184: R7.2 30.48,73.41 30.48,71.88 28.19,69.6 28.19,68.58 27.94,68.83 Q10.2
N$55  (via drill 0.6)
  Top 0.254: U1.4 60.83,44.12 61.11,44.4 65.18,44.4 65.68,43.89 65.68,42.16 64.72,41.2 v64.46,41.2
  Bottom 0.254: v64.46,41.2 64.46,40.79 63.91,40.23 63.91,32.77 64.92,31.75 RTD5-8.6
N$56  (via drill 0.6)
  Top 0.254: U1.5 59.56,44.53 60,44.96 65.84,44.96 66.75,44.04 66.75,41.66 v66.5,41.4
  Bottom 0.254: v66.5,41.4 65.94,41.4 64.77,40.23 64.77,35.56 RTD5-8.8
N$57  (via drill 0.5)
  Top 0.254: R47.2 13.33,58.8 13.08,59.05 13.08,61.54 Q12.1 13.41,61.21 v15.24,61.21
  Top 0.305: Q12.1 13.06,61.61 12.7,61.98
  Bottom 0.254: R62.1 16.38,61.09 16.26,61.21 v15.24,61.21
N$58
  Bottom 0.61: R12.2 31.16,122.51 31.75,121.92 31.75,120.6 U$11.4
N$59
  Top 0.406: LED8.A R45.1
N$60
  Bottom 0.254: U$16.1 54.02,49.35 53.49,48.82 44.86,48.82 44.25,48.21 44.25,47.16 R46.2
N$61
  Top 0.254: 15.49,68.33 15.47,68.33 Q12.2
  Top 0.406: R45.2 17.78,73.41
  Top 2.184: R1.2 17.78,73.41 17.78,72.64 15.49,70.36 15.49,68.33 15.75,68.07
N$62  (via drill 0.6)
  Top 0.406: R53.2 53.09,126.87 | 53.09,126.87 53.09,125.98 53.08,125.98 Q1.1 | 53.09,126.87 54.23,126.87 v54.86,127.25
  Bottom 0.406: v54.86,127.25 56.9,127.25 57.15,127 57.4,126.46 R25.1
N$63
  Bottom 0.406: U$12.4 45.16,124.11 R18.2
N$64
  Top 0.254: 62.99,114.32 62.99,116.08 63.5,116.08 Q2.2 | R15.2 63.5,112.01
  Top 2.184: Q2.2 63.5,112.01 R22.2
N$65
  Bottom 0.254: U$17.1 43.54,49.07 43.13,48.67 40.38,48.67 R52.2
N$66
  Top 0.254: R51.1 54.1,112.01 55.37,113.28 55.37,124.88 LED10.A
N$67
  Bottom 0.406: R25.2 57.46,121.56 U$13.4
N$68
  Top 0.254: R51.2 51.05,112.01 50.8,112.27
  Top 2.184: Q1.2 50.8,112.27 R23.2 50.8,106.68
N$69  (via drill 0.5)
  Top 0.254: LED11.C 48.64,125.86 v48.77,125.98
  Top 0.305: U$7.2 50.8,131.32 | U$6.3 60.71,132.59 61.21,133.1 61.21,134.62 60.71,135.13 51.31,135.13 50.8,134.62 +4.P$1
  Top 0.406: R53.1 49.28,126.87 | 49.28,126.87 48.77,126.87 48.77,127 | v48.77,125.98 48.77,126.37 49.28,126.87
  Top 0.61: 49.02,130.3 49.02,130.05 49.4,129.67
  Top 2.184: +4.P$1 50.8,131.32 50.8,131.06 49.4,129.67 48.77,129.03 48.77,127 v48.77,125.98 48.77,123.67 Q1.3 47.78,122.68 45.72,122.68 44.7,121.67 44.7,110.74 43.18,109.22 R29.1
  Bottom 0.406: U$12.3 43.89,118.93 44.7,118.11 47.75,118.11 48.01,118.36 48.01,125.22 v48.77,125.98
N$70  (via drill 0.6)
  Top 0.254: LED10.C 57.95,124.93 58.42,124.46 58.42,122.94
  Top 0.305: U$6.2 63.25,131.32 63.5,131.57 | U$55.3 73.66,132.59 73.91,132.84 73.91,134.62 73.41,135.13 64.01,135.13 63.5,134.62 +5.P$1
  Top 0.406: R6.1 61.35,126.37 v61.21,126.24
  Top 2.184: +5.P$1 63.5,131.57 63.5,129.79 61.21,127.51 v61.21,126.24 Q2.3 60.74,122.94 58.42,122.94 57.4,121.92 57.4,112.01 55.88,110.49 R23.1
  Bottom 0.406: U$13.3 56.14,119.38 56.39,119.13 58.93,119.13 59.44,119.63 59.44,121.64 Q2.3 61.22,125.98 61.21,125.98 v61.21,126.24
N$71
  Top 0.406: U2.2 10.73,29.52 C8.1
N$72  (via drill 0.6)
  Top 0.254: Q15.1 40.38,123.95 41.4,124.97 41.4,126.6 R59.2 41.39,126.98 41.91,127.51 v43.43,127.51
  Bottom 0.254: v43.43,127.51 44.96,127.51 45.21,127.25 45.21,126.16 R18.1
N$73
  Bottom 0.254: U$18.1 30.01,49.49 30.48,49.02 32.21,49.02 R58.2
N$74
  Top 0.254: LED11.A 43.78,124.55 42.93,123.7 42.93,113.28 41.66,112.01 R57.1
N$75
  Bottom 0.254: U$14.4 67.04,120.94 67.77,121.67 67.77,123 R31.2
N$76
  Top 0.254: R57.2 38.5,112.38 38.1,112.78
  Top 2.184: Q15.2 38.1,112.78 R29.2 38.1,106.68
N$77
  Bottom 0.254: R64.2 15.94,46.09 U$19.1
N$78
  Bottom 0.254: U$17.4 43.54,59.4 R50.2
N$79  (via drill 0.6)
  Top 0.254: LED12.C 35.69,126.11 35.81,125.98 | R59.1 37.97,126.62 36.96,127.63
  Top 0.305: U$8.2 37.34,131.32 +3.P$1 38.1,134.87 38.61,135.38 47.75,135.38 48.26,134.87 48.26,133.1 47.75,132.59 U$7.3
  Top 1.93: +3.P$1 38.1,128.78 36.96,127.63 35.81,126.49 35.81,125.98 Q15.3
  Top 2.184: R30.1 30.48,110.24 32,111.76 32,121.92 33.02,122.94 v34.04,122.94 35.34,122.94 Q15.3
  Bottom 0.61: U$11.3 30.37,118.98 30.99,118.36 33.53,118.36 33.78,118.62 33.78,122.68 v34.04,122.94
N$80  (via drill 0.6)
  Top 0.61: R65.2 27.16,126.25 27.69,125.73 | 27.69,125.73 Q17.1 | 27.69,125.73 27.69,126.24 27.43,126.49 28.7,126.49 v29.72,127.51
  Bottom 0.61: v29.72,127.51 30.23,127.51 30.99,126.75 30.99,125.55 R12.1
N$81
  Bottom 0.254: R56.2 30.25,57.47 U$18.4
N$82
  Top 0.254: LED12.A 30.86,126.11 30.23,125.48 30.23,113.54 28.96,112.27 R63.1
N$83
  Top 0.305: U$9.3 22.61,132.59 22.86,132.84 22.86,135.13 22.35,135.64 13.21,135.64 12.7,135.13 +1.P$1
  Top 0.61: 12.7,128.02 12.32,128.4 | R71.1 12.21,126.98 11.56,127.63
  Top 2.184: +1.P$1 12.7,128.78 12.32,128.4 11.56,127.63 10.41,126.49 Q19.3
N$84
  Top 0.254: R63.2 25.8,112.38 25.4,112.78
  Top 2.184: R30.2 25.4,112.78 25.4,116.33 24.89,116.84 25.08,116.84 Q17.2
N$85
  Top 0.305: R17.1 41.4,7.11 41.91,6.6 43.57,6.6 U$24.1
N$86
  pour Top (no thermals): 33.02,14.6 33.65,14.6 34.04,14.22 34.04,11.94 34.42,11.56 36.96,11.56 37.21,11.81 37.21,15.75 36.96,16 33.53,16 33.4,15.88 33.4,14.99
N$87  (via drill 0.6)
  Top 0.254: LED13.C 22.35,127.25 23.24,126.37 | R65.1 25.16,128.2 25.12,128.25
  Top 0.305: U$9.2 25.15,131.32 25.4,131.57 | U$8.3 35.31,132.59 35.56,132.84 35.56,135.13 35.05,135.64 25.91,135.64 25.4,135.13 +2.P$1
  Top 1.93: +2.P$1 25.4,131.57 25.4,128.52 25.12,128.25 23.24,126.37 23.11,126.24 Q17.3
  Top 2.184: R35.1 17.78,110.24 19.05,111.51 19.05,122.43 19.81,123.19 v20.32,123.19 22.89,123.19 Q17.3
  Bottom 0.61: U$10.3 16.93,118.71 17.02,118.62 19.81,118.62 20.07,118.87 20.07,122.94 v20.32,123.19
N$88  (via drill 0.6)
  Top 0.61: Q19.1 14.98,123.95 | 14.98,123.95 14.98,124.21 14.73,124.46 | 14.98,123.95 14.99,123.96 14.99,125.73 14.21,126.51 R71.2 16.26,126.75 v16.76,127.25
  Bottom 0.61: v16.76,127.25 16.76,125.46 R68.1
N$89  (via drill 0.5)
  Top 0.254: v12.19,55.75 10.54,55.75 10.41,55.88
  Top 0.305: U$5.2 10.16,55.63 10.41,55.88 10.67,56.13 10.67,61.98 9.91,62.74 GND.P$1
  Top 0.406: LED8.C 8.86,73.44 8.38,73.91
  Top 2.184: R1.1 9.56,78.14 8.38,76.96 8.38,73.91 GND.P$1
  Bottom 0.254: U$19.3 14.71,53.74 14.35,54.1 13.33,54.1 12.83,54.61 12.83,55.5 12.57,55.75 v12.19,55.75
N$90
  Top 0.254: LED13.A 18.51,124.93 17.27,123.7 17.27,113.54 15.75,112.01 R69.1
N$91
  Top 0.406: J1.5 66.6,3.6 65.02,2.03 R41.2
N$92
  Top 0.406: R69.2 12.83,112.01 12.7,112.14
  Top 2.184: Q19.2 12.7,112.14 R35.2
N$93
  Top 0.406: J1.6 64.6,4.65 63.5,3.56 50.1,3.56 U$23.2
  Bottom 0.406: SJ1.1 65.4,6.56 64.6,7.37 J1.6
N$94
  Top 0.406: U$23.1 51.47,2.25 51.69,2.03 R41.1
RS-A
  Top 0.305: U7.6 70.18,13.63 70.61,13.21 70.61,9.16 J1.3
  Bottom 0.305: R42.1 70.56,9.11 J1.3
RS-B
  Top 0.305: U7.7 71.84,14.91 72.64,14.1 72.64,9.19 J1.2
  Bottom 0.305: R42.2 72.56,9.11 J1.2
RX  (via drill 0.5, 0.6)
  Top 0.305: R5.2 55.38,4.56 v54.1,4.57 | U7.1 55.29,16.17 v54.61,15.49
  Bottom 0.305: U3.7 53.04,3.51 v54.1,4.57 54.61,5.08 v54.61,15.49
RX1  (via drill 0.5)
  Top 0.254: U8.1 44.84,40.22 44.09,39.47 40.89,39.47 v40.08,38.66
  Bottom 0.254: v40.08,38.66 39.06,38.66 38.66,38.25 38.71,6.3 39.32,5.59 40.64,4.27 42.06,4.27 42.69,3.63 | U3.2 43.72,3.56
  Bottom 0.305: 43.72,3.56 42.77,3.56 42.69,3.63
T1
  Top 0.254: U1.3 62.1,41.33 61.37,40.59 54.3,40.59 53.49,39.78 53.49,38.46 50.72,35.69 | 50.72,35.69 48.77,33.73 46.67,33.73 U8.36 | R3.2 51.21,35.2 50.72,35.69
T2  (via drill 0.6)
  Top 0.254: U8.38 48.01,35.36 v50.85,38.2 50.9,38.71 50.9,40.84 52.88,42.77 52.88,44.75 53.39,45.26 57,45.26 57.86,46.13 73.81,46.13 74.57,45.41 74.57,42.93 U5.3 | R4.2 53.8,36.78 v54.15,37.13
  Bottom 0.254: v54.15,37.13 51.97,37.13 v50.85,38.2
TX  (via drill 0.6)
  Top 0.305: 57.52,4.66 57.62,4.76 57.62,4.96 57.81,4.77 R2.2 57.84,4.7 59.56,4.7 60.07,5.21 60.07,8.89 60.83,9.65 60.83,11.94 61.26,12.36 U7.4 62.94,12.32 64.77,12.32 65.28,12.83 65.28,16.51 64.77,17.02 53.85,17.02 53.34,16.51 v53.34,12.57
  Bottom 0.305: U3.6 52.79,4.78 53.72,5.71 53.72,12.19 v53.34,12.57
TX1  (via drill 0.5)
  Top 0.254: U8.44 45.5,40.16 44.2,38.86 41.35,38.86 41,38.51 v41,37.44
  Bottom 0.254: v41,37.44 39.57,37.44 39.22,37.08 39.22,6.5 40.94,4.77 U3.3 43.67,4.88
V+  (via drill 0.6)
  Top 0.254: U7.8 66.5,16.17 66.29,16.38 v66.29,17.02
  Top 0.305: 50.01,6.46 U$24.4 51.98,6.51 52.45,6.98 52.45,10.29 52.96,10.8 55.73,10.8 RX.A
  Top 0.406: 55.73,10.8 57.78,10.8 58.17,11.18 58.17,11.13 TX.A 57.84,12.51 v57.66,12.7
  Bottom 0.254: v66.29,17.02 66.29,16.51 65.91,16.13 65.53,16.13 65.28,15.88 C7.1
  Bottom 0.305: 50,2.16 U3.8
  Bottom 0.406: U3.8 51.23,2.24 51.56,1.9 51.56,1.27 51.82,1.02 55.63,1.02 | 55.63,1.02 73.66,1.02 74.55,1.9 74.55,4.32 | 74.55,4.32 74.55,9.1 J1.1 74.68,9.22 74.68,13.46 73.02,15.11 65.67,15.11 | C6.1 74.42,4.19 74.55,4.32 | C22.1 55.52,1.12 55.63,1.02 | v57.66,12.7 61.59,12.7 62.1,13.21 62.1,14.73 62.48,15.11 65.67,15.11 | 65.67,15.11 C7.1
VCC
  pour Top (no thermals): 33.15,2.16 33.15,9.52 33.78,10.16 38.23,10.16 38.74,9.65 38.74,1.78 37.97,1.02 33.78,1.02 33.15,1.65
VSS
  pour Top (no thermals): 21.72,15.24 30.61,15.24 31.62,14.22 33.53,14.22 33.91,13.84 33.91,11.68 34.04,11.56 36.45,11.56 36.7,11.81 36.7,15.75 36.32,16.13 33.53,16.13 33.27,16.38 33.27,17.53 33.02,17.78 21.72,17.78 21.34,17.4 21.34,15.62

## Text on the board
tNames: RJ
Measures: PCB | Connector | Opto
_tsilk: +1 | +2 | +3 | +4 | +5 | R65 | LED12 | R59 | R53 | R6 | LED4 | R71 | Q19 | LED13 | LED11 | LED10 | Q15 | Q1 | Q2 | Q17 | R69 | R63 | R57 | R51 | R15 | R1 | R7 | R9 | R29 | R11 | R21 | R35 | R30 | R23 | R22 | R45 | LED7 | R32 | R26 | R14 | LED6 | LED5 | LED2 | LED8 | R38 | GND | Q12 | Q10 | Q8 | Q6 | Q4 | R47 | R40 | R34 | R28 | R20 | +10 | +9 | +8 | +7 | +6 | U1 | U5 | ICSP | U8 | C23 | U9 | R4 | R3 | RJ | C8 | C5 | LED1 | C24 | L1 | R10 | + | U2 | RTD1-4 | RTD5-8 | RTD9-12 | C11 | R24 | D2 | LED3 | + | L4 | C-GND | LED9 | D1 | R36 | U7 | R43 | R17 | + | L3 | C4 | D4 | D9 | V2 | J1 | RX | TX | R5 | R2 | F1 | C+ | R41
_bsilk: C15 | C12 | C14 | C13 | C16 | R18 | R25 | R12 | R31 | R68 | R33 | R19 | R27 | R70 | R13 | D:/Dropbox/EV/2015/Logo/OL-BW.bmp | R44 | R56 | R50 | R62 | R37 | C18 | C19 | C40 | C17 | C1 | R39 | R58 | R52 | R46 | R64 | C3 | C20 | C21 | R8 | C2 | C7 | U3 | R42 | R16 | C6 | C22